# EAGLE board hybrid PV panel (EAGLE 9.7.0)

Size 195.9 x 236.95 mm. Coordinates in mm from the lower left corner, seen from the top.
Outline: 0,0 195.9,0 195.9,236.95 0,236.95 0,0
Copper layers (1*16): Top 0.035mm / dielectric 1.5mm / Bottom 0.035mm
Design rules "default": minimum track width 6mil, minimum drill 0.35mm, track to track 6mil, track to pad 6mil, pad to pad 6mil, via to via 6mil, smd to smd 6mil, copper to edge 40mil, drill to drill 6mil, minimum pad ring 10mil, minimum via ring 8mil, stop-mask expansion 4mil, vias tented up to drill 0mil, thermal gap 10mil

## Footprints (pad centres in the part's own frame; a part is rotated, then mirrored left to right if it is on the bottom)
LEDRD254W60D565H860B = drill 0.981 pad 1.581: 1 -1.27,0; 2 1.27,0
PIEZO = drill 1 pad 1.6: 1 -3.5,0; 2 3.5,0
GL5528 = drill 0.8 pad 1.4: 1 -1.702,0; 2 1.702,0
RESAD1016W63L850D250B = drill 0.83 pad 1.43: 1 -5.08,0; 2 5.08,0
BATTERY-GENERIC = drill 1.118 pad 3.15 octagon: + 2.54,0; - -2.54,0
SG90 = drill 1.016 long: 1 -2.54,0; 2 0,0; 3 2.54,0
ARDUINO-UNO-R3-SHIELD = drill 1.016 pad 1.88: 3.3V 24.13,-2.54; 5V 24.13,0; A0 24.13,12.7; A1 24.13,15.24; A2 24.13,17.78; A3 24.13,20.32; A4 24.13,22.86; A5 24.13,25.4; AREF -24.13,-13.97; D2 -24.13,20.32; D3 -24.13,17.78; D4 -24.13,15.24; D5 -24.13,12.7; D6 -24.13,10.16; D7 -24.13,7.62; D8 -24.13,3.81; D9 -24.13,1.27; D10 -24.13,-1.27; D11 -24.13,-3.81; D12 -24.13,-6.35; D13 -24.13,-8.89; GND@0 24.13,2.54; GND@1 24.13,5.08; GND@2 -24.13,-11.43; IOREF 24.13,-7.62; NC 24.13,-10.16; RES 24.13,-5.08; RX -24.13,25.4; SCL -24.13,-19.05; SDA -24.13,-16.51; TX -24.13,22.86; VIN 24.13,7.62
TO92 = drill 0.813 octagon: 1 -1.27,0; 2 0,1.905; 3 1.27,0

## Placement (x,y rotation side)
D1  RED  [LEDRD254W60D565H860B]  109.2,118.01 180 top
PIEZO1  PIEZO  [PIEZO]  12.3,44.76 0 top
PIEZO2  PIEZO  [PIEZO]  43.38,44.98 0 top
PIEZO3  PIEZO  [PIEZO]  75.52,44.63 0 top
PIEZO5  PIEZO  [PIEZO]  106.96,45.68 0 top
PIEZO6  PIEZO  [PIEZO]  12.99,13.58 0 top
PIEZO7  PIEZO  [PIEZO]  138.93,45.07 0 top
PIEZO8  PIEZO  [PIEZO]  44.04,14.44 0 top
PIEZO9  PIEZO  [PIEZO]  74.67,14.44 0 top
PIEZO10  PIEZO  [PIEZO]  108.31,14.87 0 top
PIEZO11  PIEZO  [PIEZO]  139.79,14.87 0 top
R1  PHOTOCELL_GL5528  [GL5528]  7.6,123.09 0 top
R2  PHOTOCELL_GL5528  [GL5528]  17.76,123.09 0 top
R3  PHOTOCELL_GL5528  [GL5528]  27.92,123.09 0 top
R4  PHOTOCELL_GL5528  [GL5528]  38.08,123.09 0 top
R5  1k  [RESAD1016W63L850D250B]  6.33,110.39 90 top
R6  1k  [RESAD1016W63L850D250B]  16.49,110.39 90 top
R7  1k  [RESAD1016W63L850D250B]  26.65,110.39 90 top
R8  1k  [RESAD1016W63L850D250B]  36.81,110.39 90 top
R9  1k  [RESAD1016W63L850D250B]  140.95,112.93 90 top
R10  1k  [RESAD1016W63L850D250B]  153.65,112.93 90 top
R11  1k  [RESAD1016W63L850D250B]  146.03,112.93 90 top
R12  1k  [RESAD1016W63L850D250B]  133.33,112.93 90 top
R13  1k  [RESAD1016W63L850D250B]  110.47,110.39 90 top
SC1  BATTERYGENERIC  [BATTERY-GENERIC]  187.64,100.11 90 top
SERVO1  SERVOSG90  [SG90]  152.33,229.96 90 top
SERVO2  SERVOSG90  [SG90]  154.22,188.21 90 top
U1  ARDUINO-UNO-R3-SHIELD  [ARDUINO-UNO-R3-SHIELD]  86.49,207.01 270 top
U2  TMP36GT9Z_TO92  [TO92]  59.67,105.31 0 top

## Library data of the parts
D1 = Tinkercad; CATEGORY: Opto-Electronic; SUB-CATEGORY: LED; VALUE: LED_RED
PIEZO1-PIEZO3 PIEZO5-PIEZO11 R1-R13 SC1 SERVO1 SERVO2 U1 U2 = Tinkercad

## Nets
PIEZO1_1: PIEZO1.1 PIEZO2.1 PIEZO3.1 PIEZO5.1 PIEZO6.1 PIEZO7.1 PIEZO8.1 PIEZO9.1 PIEZO10.1 PIEZO11.1 R9.1
PIEZO11_2: PIEZO1.2 PIEZO2.2 PIEZO3.2 PIEZO5.2 PIEZO6.2 PIEZO7.2 PIEZO8.2 PIEZO9.2 PIEZO10.2 PIEZO11.2 R12.1
R9_2: R9.2 R12.2
R11_2: R10.2 R11.2
SC1+: R10.1 SC1.+
SC1-: R11.1 SC1.-
U1_5V: R1.2 R2.2 R3.2 SERVO1.2 SERVO2.2 U1.5V U2.3
U1_A2: R1.1 R5.2 U1.A2
U1_A3: R2.1 R6.2 U1.A3
U1_A4: R3.1 R7.2 U1.A4
U1_A5: R4.1 R8.2 U1.A5
U1_D2: U1.D2 U2.2
U1_D3: D1.2 U1.D3
U1_D5: SERVO2.3 U1.D5
U1_D6: SERVO1.3 U1.D6
U1_GND: R4.2 R5.1 R6.1 R7.1 R8.1 R13.1 SERVO1.1 SERVO2.1 U1.GND@0 U1.GND@1 U1.GND@2 U2.1

## Tracks (layer width: path | path; a pad name or v marks a point on that pad's centre or on a via)
PIEZO1_1  (10 unrouted)
PIEZO11_2  (10 unrouted)
R9_2  (1 unrouted)
R11_2  (1 unrouted)
SC1+  (1 unrouted)
SC1-  (1 unrouted)
U1_5V  (6 unrouted)
U1_A2  (2 unrouted)
U1_A3  (2 unrouted)
U1_A4  (2 unrouted)
U1_A5  (2 unrouted)
U1_D2  (1 unrouted)
U1_D3  (1 unrouted)
U1_D5  (1 unrouted)
U1_D6  (1 unrouted)
U1_GND  (11 unrouted)